# EAGLE board USB-C-UPDI (EAGLE 9.6.2)
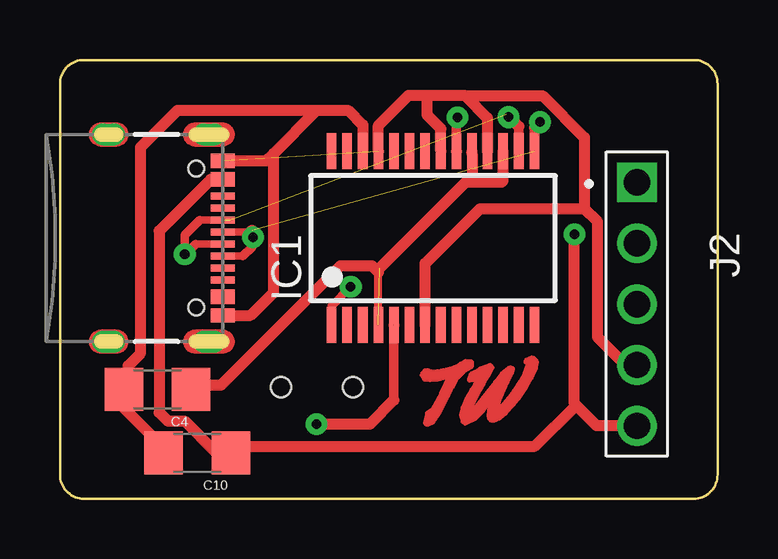
[diagram p0: board, top side]
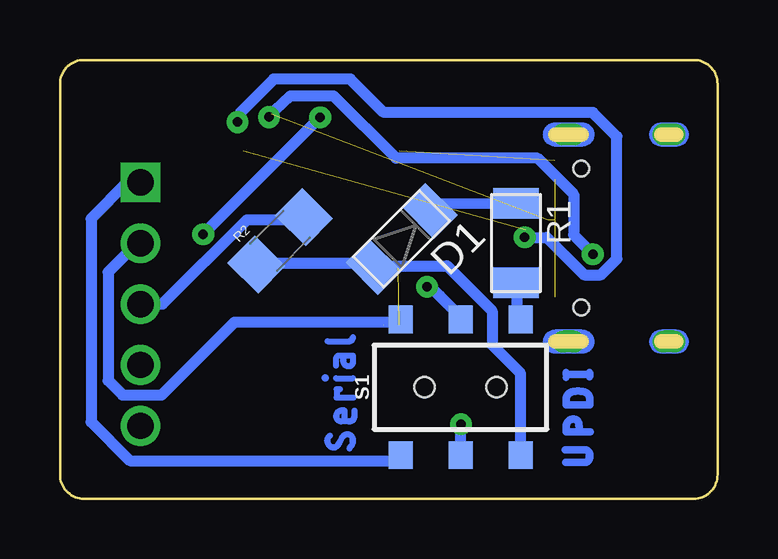
[diagram p1: board, bottom side, seen from below]

Size 27.4 x 18.3 mm. Coordinates in mm from the lower left corner, seen from the top.
Outline: 26.4,0 1,0 arc-90 0,1 0,17.3 arc-90 1,18.3 26.4,18.3 arc-90 27.4,17.3 27.4,1 arc-90 26.4,0
Copper layers (1*16): Top 0.035mm / dielectric 1.5mm / Bottom 0.035mm
Design rules "OthermillDRC_30_deg_v2": minimum track width 6mil, minimum drill 0.8mm, track to track 6mil, track to pad 6mil, pad to pad 6mil, via to via 6mil, smd to smd 0mil, copper to edge 0mil, drill to drill 6mil, minimum pad ring 10mil, minimum via ring 10mil, stop-mask expansion 1mil, vias tented up to drill 30mil, thermal gap 6mil
Net classes: 0 default: width 0.457 mm

## Footprints (pad centres in the part's own frame; a part is rotated, then mirrored left to right if it is on the bottom)
1206 = smd 1.6 x 1.8: 1 -1.4,0; 2 1.4,0
MINI-SMA = smd 1.4 x 1.9: ANODE 1.65,0; KATHODE -1.65,0
SSOP28 = smd 0.4 x 1.5: 1 -4.225,-3.625; 2 -3.575,-3.625; 3 -2.925,-3.625; 4 -2.275,-3.625; 5 -1.625,-3.625; 6 -0.975,-3.625; 7 -0.325,-3.625; 8 0.325,-3.625; 9 0.975,-3.625; 10 1.625,-3.625; 11 2.275,-3.625; 12 2.925,-3.625; 13 3.575,-3.625; 14 4.225,-3.625; 15 4.225,3.625; 16 3.575,3.625; 17 2.925,3.625; 18 2.275,3.625; 19 1.625,3.625; 20 0.975,3.625; 21 0.325,3.625; 22 -0.325,3.625; 23 -0.975,3.625; 24 -1.625,3.625; 25 -2.275,3.625; 26 -2.925,3.625; 27 -3.575,3.625; 28 -4.225,3.625
USB-C-16P-2LAYER-PADS = smd 0.3 x 1: A5 -1.25,-0.34; A6 -0.25,-0.34; A7 0.25,-0.34; A8 1.25,-0.34; B5 1.75,-0.34; B6 0.75,-0.34; B7 -0.75,-0.34; B8 -1.75,-0.34 | smd 0.6 x 1: GND -3.225,-0.34; GND2 3.225,-0.34; VBUS1 -2.45,-0.34; VBUS2 2.45,-0.34 | drill 0.4 pad 0.6 long: SHLD1 -4.318,-0.915; SHLD2 4.318,-0.915; SHLD3 -4.318,-5.095; SHLD4 4.318,-5.095 | hole 0.65: -2.89,-1.445; 2.89,-1.445
61300511121 = drill 1.1 square: 1 -5.08,0 | drill 1.1: 2 -2.54,0; 3 0,0; 4 2.54,0; 5 5.08,0
R1206FAB = smd 1.27 x 1.905: 1 -1.651,0; 2 1.651,0
SWITCH_DPDT_SMD_AYZ0202 = smd 1 x 1.15: 1 -2.5,2.825; 2 0,2.825; 3 2.5,2.825; 4 -2.5,-2.825; 5 0,-2.825; 6 2.5,-2.825 | hole 0.85: 1.5,0; -1.5,0

## Placement (x,y rotation side)
C4  100nf  [1206]  4.06,4.56 180 top
C10  1uf  [1206]  5.72,1.91 180 top
D1  SCHOTTKY  [MINI-SMA]  13.17,10.84 225 bottom
IC1  FT232RL  [SSOP28]  15.54,10.87 0 top
J1  [USB-C-16P-2LAYER-PADS]  7.12,10.87 270 top
J2  61300511121  [61300511121]  24.04,8.12 270 top
R1  1.5k  [R1206FAB]  8.4,10.66 270 bottom
R2  470  [1206]  18.23,10.76 45 bottom
S1  [SWITCH_DPDT_SMD_AYZ0202]  10.71,4.65 0 bottom

## Library data of the parts
C4 C10 R2 = 01_SparkFun
D1 R1 = eagle_fab
IC1 = ftdichip; MPN: FT232RL; OC_FARNELL: 1146032; OC_NEWARK: 91K9918
J1 = SparkFun-Connectors; PROD_ID: CONN-14122
J2 = Headers; CREATED_BY: PCBLayout.com; DIGI_KEY_PART_NUMBER: 732-5318-ND; MANUFACTURER: Wurth Electronics Inc.; MPN: 61300511121
S1 = SparkFun-Switches; PROD_ID: SWCH-08179; SF_SKU: COM-00597

## Nets
GND: C4.2 C10.2 IC1.7 IC1.18 IC1.21 IC1.25 IC1.26 J1.GND J1.GND2 J2.4
N$1: IC1.15 J1.A6 J1.B6
N$2: IC1.16 J1.A7 J1.B7
N$3: D1.ANODE R2.1 S1.6
N$4: D1.KATHODE R1.1
N$7: IC1.5 S1.5
N$9: C4.1 IC1.4 IC1.17 IC1.19
N$10: IC1.1 S1.2
N$11: R1.2 S1.3
RX: J2.1 S1.4
TX: J2.2 S1.1
UPDI: J2.3 R2.2
VCC: C10.1 IC1.20 J1.VBUS1 J1.VBUS2 J2.5

## Tracks (layer width: path | path; a pad name or v marks a point on that pad's centre or on a via)
GND  (1 unrouted)
  Top 0.457: 16.88,16.81 16.86,16.82 15.3,16.82 | 16.88,16.81 17.81,15.88 17.81,14.53 IC1.18 | 21.85,12.1 21.85,15.07 20.11,16.81 16.88,16.81 | IC1.26 12.62,15.58 12,16.2 10.7,16.2 | 10.7,16.2 4.9,16.2 3.36,14.66 3.36,6.06 2.84,5.54 2.84,4.63 C4.2 2.66,3.79 4.32,2.13 C10.2 | J1.GND 8.6,14.1 8.9,14.4 | 8.9,14.4 10.7,16.2 | J1.GND2 7.94,7.64 8.9,8.6 8.9,14.4 | IC1.25 13.26,15.56 14.52,16.82 15.3,16.82 | IC1.21 15.87,15.44 15.3,16 15.3,16.82 | IC1.7 15.21,9.81 17.5,12.1 21.85,12.1 | 21.85,12.1 22.4,11.55 22.4,6.73 23.55,5.58 J2.4
N$1  (1 unrouted)
  Top 0.305: J1.A6 7.92,11.12 | J1.B6 7.62,10.12
  Top 0.356: 7.62,10.12 8,10.5 8,11.04
  Top 0.4: 19.77,15.48 IC1.15
  Top 0.457: 19.77,15.48 19.98,15.69 | 8,11.2 7.92,11.12 8,11.04
N$2  (2 unrouted)
  Top 0.305: J1.A7 5.66,10.62 | 5.82,11.62 7.07,11.62
  Top 0.356: 5.82,11.62 5.2,11 5.2,10.16 5.66,10.62
  Top 0.4: IC1.16 19.12,15.53
  Top 0.457: 19.12,15.53 18.6,16.04
N$3
  Bottom 0.457: 14.12,9.51 D1.ANODE | R2.1 19,9.81 14.43,9.81 D1.ANODE | D1.ANODE 14.3,9.71 11.27,9.71 9.4,7.84 9.4,6.42 8.21,5.22 S1.6
N$4
  Bottom 0.457: 11.99,12.25 D1.KATHODE
  Bottom 0.46: R1.1 11.65,12.3 D1.KATHODE
N$5  (via drill 0.4)
  Bottom 0.457: v8.04,10.9 7.12,10.9 5.56,9.34 4.86,9.34 4.2,10 4.2,15.1 5.2,16.1 13.9,16.1 15.3,17.5 18.5,17.5 19.9,16.1 19.9,15.7
N$6
  Bottom 0.457: 17.82,16.77 18.74,15.91
N$7  (via drill 0.4)  (1 unrouted)
  Top 0.4: IC1.5 13.91,4.12
  Top 0.457: IC1.5 | 13.91,4.12 12.91,3.11 v10.69,3.11
  Bottom 0.457: S1.5 10.71,3.09 v10.69,3.11
N$8  (via drill 0.4)
  other vias: 18.69,15.92
N$9  (1 unrouted)
  Top 0.33: IC1.4 13.26,9.45
  Top 0.457: 16.9,13.2 17.17,13.47 17.17,14.38 IC1.19 | 16.9,13.2 13.32,9.62 | C4.1 5.77,4.73 6.7,4.73 11.68,9.71 13.01,9.71 13.26,9.45 | 16.9,13.2 18.4,13.2 18.46,13.26 IC1.17
N$10  (via drill 0.4)
  Top 0.33: IC1.1 11.31,8.04 v12.11,8.84
  Bottom 0.457: v12.11,8.84 12.04,8.92 11.58,8.46 11.57,8.46 10.76,7.65 S1.2
N$11
  Bottom 0.457: 8.37,7.74 S1.3
  Bottom 0.46: R1.2 8.37,7.74
N$12  (via drill 0.4)
  other vias: 20,15.71
N$13  (via drill 0.4)
  Bottom 0.457: v5.2,10.2 6,11 6,12.7 7.5,14.2 13.4,14.2 16,16.8 17.79,16.8
N$14
  Top 0.2: 15.95,4.52 15.9,4.41 15.7,4.03 15.49,3.66 15.45,3.66 15.31,3.57 15.22,3.15 15.28,3.1 15.55,3.23 15.77,3.56 15.96,3.93 16.15,4.29 16.26,4.52
N$15
  Top 0.2: 15.95,4.52 16.08,4.77 16.24,5.14 16.05,5.09 15.74,5.01 15.41,4.97 15.19,5 15.08,5.16 15.13,5.23 15.21,5.34 15.33,5.32 15.54,5.27 15.86,5.3 16.18,5.37 16.45,5.46 16.69,5.6 16.9,5.73 17.15,5.7 17.15,5.53 16.82,5.34 16.53,5.04 16.33,4.67 16.26,4.52
N$16
  Top 0.2: 17.36,4.31 17.2,4 17.05,3.54 17.27,3.75 17.89,4.52
N$17
  Top 0.2: 17.36,4.31 17.4,4.4 17.63,4.79 17.82,5.12 18,5.46 17.94,5.55 17.5,5.39 17.33,5.27 17.13,5.18 17.06,4.95 17.37,4.97 17.45,5.02 17.31,4.78 17.17,4.55 17.04,4.31
N$18
  Top 0.2: 18.8,4.31 18.69,4.17 18.41,3.85 18.2,3.72 18.3,4.12
N$19
  Top 0.2: 18.8,4.31 18.95,4.51 19.18,4.87 19.38,5.24 19.52,5.63 19.48,5.69 19.42,5.7 19.42,5.75 19.69,5.87 19.86,5.7 19.8,5.43 19.62,5.03 19.4,4.64 19.17,4.31
N$20
  Top 0.2: 17.04,4.31 16.97,4.18 16.79,3.8 16.72,3.5 16.8,3.21 16.88,3.16 17.3,3.36 17.63,3.72 17.93,4.1 18.03,4.18 17.91,3.82 17.87,3.46 17.91,3.31 18.04,3.27 18.33,3.39 18.57,3.6 18.87,3.93 19.15,4.28 19.17,4.31
N$21
  Top 0.2: 18.3,4.15 18.4,4.4 18.62,4.87 18.8,5.23 18.86,5.42 18.74,5.45 18.42,5.2 18.15,4.86 17.91,4.54
N$22
  Top 0.2: 15.28,5.16 15.43,5.12 15.68,5.14 15.94,5.19 16.23,5.24 16.57,5.35 16.73,5.43 16.98,5.57 16.33,5.06 16.2,4.71 16.04,4.34 15.85,3.97 15.69,3.68 15.53,3.45 15.48,3.48 15.43,3.35 15.38,3.28 15.55,3.33
N$23
  Top 0.2: 17.22,5.08 17.37,5.13 17.5,5.23 17.79,5.34 17.69,5.14 17.55,5.07 17.52,4.93 17.39,4.63 17.19,4.34 17,3.93 16.89,3.52 16.93,3.33 17.06,3.39 17.31,3.56 17.54,3.79 17.67,3.97 17.92,4.27 18.11,4.55 18.28,4.78 18.41,4.96 18.57,5.11 18.68,5.24 18.43,4.76 18.34,4.61 18.2,4.38 18.09,4.23 18.15,4.19 18.1,3.97 18.06,3.7 18.05,3.55 18.03,3.42 18.14,3.56 18.21,3.51 18.26,3.58 18.44,3.67 18.55,3.76 18.8,4.03 18.94,4.25 19.22,4.65 19.44,5.04 19.57,5.27 19.64,5.46 19.69,5.61 19.64,5.7
N$24
  Bottom 0.32: 16.35,5.03 16.35,5.04
N$25
  Bottom 0.25: 15.91,5.02 15.2,5.02
N$26
  Bottom 0.25: 15.74,4.57 15.87,4.57 15.87,4.22 15.18,4.22
N$27
  Bottom 0.25: 15.9,5.56 15.9,5.82 arc100 15.72,5.97 15.2,5.97 | 15.2,5.97 15.19,5.97 | 15.2,5.97 15.2,5.69 arc90 15.37,5.52 arc85 15.59,5.72 arc11 15.59,5.92
N$28
  Bottom 0.25: 16.25,6.57 15.35,6.57 arc-97 15.2,6.74
N$29
  Bottom 0.25: 15.13,3.68 15.14,3.42 arc93 15.37,3.22
N$30
  Bottom 0.25: 15.36,3.22 15.69,3.22
N$31
  Bottom 0.25: 15.54,3.23 15.54,3.68 15.66,3.68 arc-85 15.89,3.47 arc-74 15.74,3.23
N$32
  Bottom 0.25: 15.34,2.1 15.26,2.21 arc-54 15.21,2.53 arc-66 15.41,2.69 arc-50 15.58,2.63 arc-21 15.72,2.43 arc9 15.83,2.23 arc85 16.1,2.16 arc42 16.24,2.32 arc69 16.16,2.63
N$33
  Bottom 0.32: 6.32,1.51 5.56,1.51 arc-102 5.34,1.78
N$34
  Bottom 0.32: 6.34,2.05 5.55,2.05 arc106 5.34,1.77
N$35
  Bottom 0.32: 5.31,2.8 6.3,2.8 | 6.3,2.8 6.31,2.8 | 6.3,2.8 6.3,3.05 arc59 6.17,3.28 arc41 5.96,3.32 arc71 5.79,3.15 arc15 5.78,2.84
N$36
  Bottom 0.32: 6.31,3.94 6.31,3.92 5.34,3.92
N$37
  Bottom 0.32: 6.3,3.93 6.3,4.18 arc39 6.24,4.35 arc38 6.08,4.45
N$38
  Bottom 0.32: 5.32,3.91 5.32,4.15 arc-39 5.39,4.35 arc-35 5.54,4.45 arc-32 6.09,4.45
N$39
  Bottom 0.32: 6.31,5.18 5.33,5.18 5.33,5.17
N$40
  Bottom 0.3: 5.33,5.28 5.33,5.07
N$41
  Bottom 0.3: 6.31,5.27 6.31,5.06
RX
  Bottom 0.457: S1.4 13.51,1.58 24.48,1.58 26.11,3.21 26.11,11.69 24.59,13.2 J2.1
TX
  Bottom 0.457: J2.2 24.19,10.66 25.4,9.45 25.4,4.93 24.79,4.32 23.17,4.32 20.12,7.37 13.51,7.37 S1.1
UPDI
  Bottom 0.457: J2.3 23.13,8.12 19.61,11.64 17.47,11.64 R2.2
VCC  (via drill 0.4)  (1 unrouted)
  Top 0.4: 16.52,15.87 IC1.20
  Top 0.457: v16.56,15.91 16.52,15.87 | IC1.20 | J2.5 22.36,3.04 21.5,3.9 | 21.5,3.9 21.44,3.96 v21.44,11.03 | 21.5,3.9 19.79,2.19 7.39,2.19 C10.1 6.52,1.91 5.19,3.24 4.49,3.24 4.13,3.6 4.13,11.17 6.27,13.31 J1.VBUS1
  Bottom 0.457: v21.44,11.03 v16.56,15.91